# EAGLE board RPi Zero W Breakout 0.3 (EAGLE 9.2.2)

Size 90 x 55 mm. Coordinates in mm from the lower left corner, seen from the top.
Outline: 10,0 80,0 arc90 90,10 90,45 arc90 80,55 10,55 arc90 0,45 0,10 arc90 10,0
Copper layers (1*16): Top 0.035mm / dielectric 1.5mm / Bottom 0.035mm
Design rules "default": minimum track width 6mil, minimum drill 0.35mm, track to track 6mil, track to pad 6mil, pad to pad 6mil, via to via 6mil, smd to smd 6mil, copper to edge 40mil, drill to drill 6mil, minimum pad ring 10mil, minimum via ring 8mil, stop-mask expansion 4mil, vias tented up to drill 0mil, thermal gap 10mil
Holes 2.5 mm at 10,45 10,10 80,10 80,45

## Footprints (pad centres in the part's own frame; a part is rotated, then mirrored left to right if it is on the bottom)
1825910 = drill 1: P$1 0,0; P$2 6.502,0; P$3 6.502,4.47; P$4 0,4.496
C0805K = smd 1.3 x 1.6: 1 -1,0; 2 1,0
UWT(8X10) = smd 4 x 2.15: 1 -3.35,0; 2 3.35,0
SWITCHCRAFT_35RAPC4BHN2 = drill 0.6 pad 1.3 long: 1 0,-1; 2 5,4; 3 -5,4; 10 2.5,4; 11 -2.5,4 | hole 1.2: 0,4; -5,-1; -5,-3.5; 5,-1; 5,-3.5
1825027-6 = drill 1: P$1 0,0; P$2 4.5,0 | drill 1.3: P$3 -1.25,2.5; P$4 5.75,2.5
SP-1208 = drill 1: P$1 0,0; P$2 10.16,0
FH12-10S-0.5SH = smd 0.3 x 1.3: 1 -2.25,3.25; 2 -1.75,3.25; 3 -1.25,3.25; 4 -0.75,3.25; 5 -0.25,3.25; 6 0.25,3.25; 7 0.75,3.25; 8 1.25,3.25; 9 1.75,3.25; 10 2.25,3.25
R0805 = smd 1.3 x 1.5: 1 -0.95,0; 2 0.95,0
RPI_ZERO = drill 1: 1 -24.13,-1.27; 2 -24.13,1.27; 3 -21.59,-1.27; 4 -21.336,1.27; 5 -19.05,-1.27; 6 -19.05,1.27; 7 -16.51,-1.27; 8 -16.51,1.27; 9 -13.97,-1.27; 10 -13.97,1.27; 11 -11.43,-1.27; 12 -11.43,1.27; 13 -8.89,-1.27; 14 -8.89,1.27; 15 -6.35,-1.27; 16 -6.35,1.27; 17 -3.81,-1.27; 18 -3.81,1.27; 19 -1.27,-1.27; 20 -1.27,1.27; 21 1.27,-1.27; 22 1.27,1.27; 23 3.81,-1.27; 24 3.81,1.27; 25 6.35,-1.27; 26 6.35,1.27; 27 8.89,-1.27; 28 8.89,1.27; 29 11.43,-1.27; 30 11.43,1.27; 31 13.97,-1.27; 32 13.97,1.27; 33 16.51,-1.27; 34 16.51,1.27; 35 19.05,-1.27; 36 19.05,1.27; 37 21.59,-1.27; 38 21.59,1.27; 39 24.13,-1.27; 40 24.13,1.27 | hole 2.5: -29,0; 29,0
NOPBCT-ND = smd 0.45 x 1.45: BYPASS 0.75,-2.23; GND 1.4,-2.23; SHUTDOWN 1.4,2.17; VDD -0.55,2.17; VI1 -0.55,-2.23; VI2 0.75,2.17; VO1 0.1,-2.23; VO2 0.1,2.17
M22-6340442 = smd 1.27 x 0.635: P1 -2.54,2.54; P2 -2.54,0.54; P3 -2.54,-1.46; P4 -2.54,-3.46; P5 2.76,-3.46; P6 2.76,-1.46; P7 2.76,0.54; P8 2.76,2.54
RK14J12A0A0K = drill 1: 1 0,-6.5; R1_2 4,-6.5; R1_3 -4,-6.5; R2_2 2,-6.5; R2_3 -2,-6.5

## Placement (x,y rotation side)
A  SWITCHTACTILESPST-NO0.05A24V  [1825910]  25,20 0 top
B  SWITCHTACTILESPST-NO0.05A24V  [1825910]  15,30 0 top
C1  33n  [C0805K]  4.57,-27.94 0 top  (outside the outline)
C2  33n  [C0805K]  8.13,-27.94 0 top  (outside the outline)
C3  1.5uF  [C0805K]  27.69,-18.03 0 top  (outside the outline)
C4  1.5uF  [C0805K]  27.69,-22.86 0 top  (outside the outline)
C5  1000uF  [UWT(8X10)]  -0.76,-53.85 0 top  (outside the outline)
C6  1000uF  [UWT(8X10)]  31.24,-11.18 0 top  (outside the outline)
DOWN  SWITCHTACTILESPST-NO0.05A24V  [1825910]  50,5 0 top
J1  35RAPC4BHN2  [SWITCHCRAFT_35RAPC4BHN2]  -13.41,11.84 0 bottom  (outside the outline)
L  SWITCHTACTILESPST-NO0.05A24V  [1825027-6]  10,50 0 top
LEFT  SWITCHTACTILESPST-NO0.05A24V  [1825910]  60,20 0 top
LSPK  SP-1208  [SP-1208]  -5.08,-44.96 0 top  (outside the outline)
PIN1  FH12-10S-0.5SH  [FH12-10S-0.5SH]  45,34 180 top
R  SWITCHTACTILESPST-NO0.05A24V  [1825027-6]  75,50 0 top
R1  270  [R0805]  8.13,-23.62 0 top  (outside the outline)
R2  270  [R0805]  12.45,-23.62 0 top  (outside the outline)
R3  150  [R0805]  16.76,-23.62 0 top  (outside the outline)
R4  150  [R0805]  0.51,-28.7 0 top  (outside the outline)
R5  5K  [R0805]  27.94,-28.45 0 top  (outside the outline)
R6  5K  [R0805]  27.94,-34.8 0 top  (outside the outline)
R7  5K  [R0805]  -4.32,-61.47 0 top  (outside the outline)
R8  5K  [R0805]  -4.32,-67.82 0 top  (outside the outline)
RESET  SWITCHTACTILESPST-NO0.05A24V  [1825910]  15,10 0 top
RIGHT  SWITCHTACTILESPST-NO0.05A24V  [1825910]  80,20 0 top
RSPK  SP-1208  [SP-1208]  -5.08,-48.01 0 top  (outside the outline)
SELECT  SWITCHTACTILESPST-NO0.05A24V  [1825910]  30,5 0 top
START  SWITCHTACTILESPST-NO0.05A24V  [1825910]  70,30 0 top
U$1  RPI_ZERO  [RPI_ZERO]  45,27 0 bottom
U$2  LM4810MM/NOPBCT-ND  [NOPBCT-ND]  -4.57,-36.07 0 top  (outside the outline)
U$3  M22-6340442  [M22-6340442]  2.79,-35.05 0 top  (outside the outline)
U$4  RK14J12A0A0K  [RK14J12A0A0K]  4.47,34.53 270 bottom
UP  SWITCHTACTILESPST-NO0.05A24V  [1825910]  70,10 0 top
X  SWITCHTACTILESPST-NO0.05A24V  [1825910]  5,20 0 top
Y  SWITCHTACTILESPST-NO0.05A24V  [1825910]  40,5 0 top

## Library data of the parts
A B DOWN LEFT RESET RIGHT SELECT START UP X Y = SWITCH TACTILE SPST-NO 0.05A 24V
C1-C4 = rcl; SPICEPREFIX: C
C5 C6 = SamacSys_Parts; DESCRIPTION: Nichicon 1000uF +/-20% 6.3 V 5101-4 SMD Metal Can Aluminium Electrolytic Capacitor; HEIGHT: mm; MANUFACTURER_NAME: Nichicon; MANUFACTURER_PART_NUMBER: UWT0J102MNL1GS; MOUSER_PART_NUMBER: 647-UWT0J102MNL1S
J1 = 35RAPC4BHN2; DESCRIPTION: Conn 3.5MM Stereo Jack F 5 POS Solder RA Thru-Hole 5 Terminal 1 Port; DIGI-KEY_PART_NUMBER: SC1459-ND; DIGI-KEY_PURCHASE_URL: https://www.digikey.com/product-detail/en/switchcraft-inc/35RAPC4BHN2/SC1459-ND/1288690?utm_source=snapeda&utm_medium=aggregator&utm_campaign=symbol; MF: Switchcraft; MP: 35RAPC4BHN2; PACKAGE: None
L R = 1825027-6
LSPK RSPK = SP-1208
PIN1 = con-hirose; MPN: FH12-10S-0.5SH(55); OC_FARNELL: 1324540; OC_NEWARK: 34M6152
R1-R8 = rcl; SPICEPREFIX: R
U$1 = RaspberryPi
U$2 = LM4810MM
U$3 = M22-6340442
U$4 = RK14J12A0A0K

## Nets
3V3: U$1.1
5V: PIN1.9 U$1.2 U$1.4 U$2.VDD U$3.P1
A: A.P$3 U$1.3
B: B.P$3 U$1.5
CLK: PIN1.3 U$1.23
CS: PIN1.5 U$1.24
DOWN: DOWN.P$3 U$1.8
GND: C1.2 C2.2 J1.1 LSPK.P$2 PIN1.10 R3.1 R4.1 RSPK.P$2 U$1.6 U$1.9 U$1.14 U$1.20 U$1.25 U$1.30 U$1.34 U$1.39 U$2.BYPASS U$2.GND U$2.SHUTDOWN U$3.P2
HOME: RESET.P$3 U$1.40
L: L.P$3 L.P$4 U$1.26
LEDK: PIN1.1 U$1.12
LEFT: LEFT.P$3 U$1.36
LPWM: R1.1 U$1.32
MISO: PIN1.2 U$1.21
MOSI: PIN1.4 U$1.19
N$1: C1.1 C3.1 R1.2 R3.2
N$2: C2.1 C4.1 R2.2 R4.2
N$4: C3.2 R5.2
N$5: R7.1 U$4.R2_3
N$6: C4.2 R6.2
N$7: R8.1 U$4.R1_3
N$8: C6.1 U$2.VO1 U$4.R1_2
N$9: C5.1 U$2.VO2 U$4.R2_2
N$10: C5.2 J1.2
N$11: C6.2 J1.3
N$12: J1.10 RSPK.P$1
N$13: J1.11 LSPK.P$1
N$14: R5.1 R7.2 U$2.VI2
N$15: R6.1 R8.2 U$2.VI1
N$18: A.P$2 B.P$2 DOWN.P$1 LEFT.P$2 RIGHT.P$1 UP.P$2 X.P$1 Y.P$1
N$19: L.P$1 L.P$2 R.P$1 R.P$2 RESET.P$2 SELECT.P$1 START.P$2
R: R.P$3 R.P$4 U$1.10
RESET: PIN1.8 U$1.22
RIGHT: RIGHT.P$3 U$1.11
RPWM: R2.1 U$1.33
RS/DC: PIN1.7 U$1.18
SELECT: SELECT.P$3 U$1.38
START: START.P$3 U$1.37
UP: U$1.31 UP.P$3
X: U$1.7 X.P$3
Y: U$1.29 Y.P$3

## Tracks (layer width: path | path; a pad name or v marks a point on that pad's centre or on a via)
5V  (4 unrouted)
A  (1 unrouted)
B  (1 unrouted)
CLK  (1 unrouted)
CS  (1 unrouted)
DOWN  (1 unrouted)
GND  (19 unrouted)
HOME  (1 unrouted)
L  (2 unrouted)
LEDK  (1 unrouted)
LEFT  (1 unrouted)
LPWM  (1 unrouted)
MISO  (1 unrouted)
MOSI  (1 unrouted)
N$1  (3 unrouted)
N$2  (3 unrouted)
N$4  (1 unrouted)
N$5  (1 unrouted)
N$6  (1 unrouted)
N$7  (1 unrouted)
N$8  (2 unrouted)
N$9  (2 unrouted)
N$10  (1 unrouted)
N$11  (1 unrouted)
N$12  (1 unrouted)
N$13  (1 unrouted)
N$14  (2 unrouted)
N$15  (2 unrouted)
N$18  (7 unrouted)
N$19  (6 unrouted)
R  (2 unrouted)
RESET  (1 unrouted)
RIGHT  (1 unrouted)
RPWM  (1 unrouted)
RS/DC  (1 unrouted)
SELECT  (1 unrouted)
START  (1 unrouted)
UP  (1 unrouted)
X  (1 unrouted)
Y  (1 unrouted)